# Altium PCB Controller_BattleBot.PcbDoc
Units mil, origin at the board's own origin, x right, y up, seen from the top; angles counter-clockwise.
Board outline 2000 x 1235 mil, 2 copper layers (Top Layer, Bottom Layer); 39 components, 24 nets, 147 pads, 17 vias.
Unrouted connection lines stored in the file: 6.
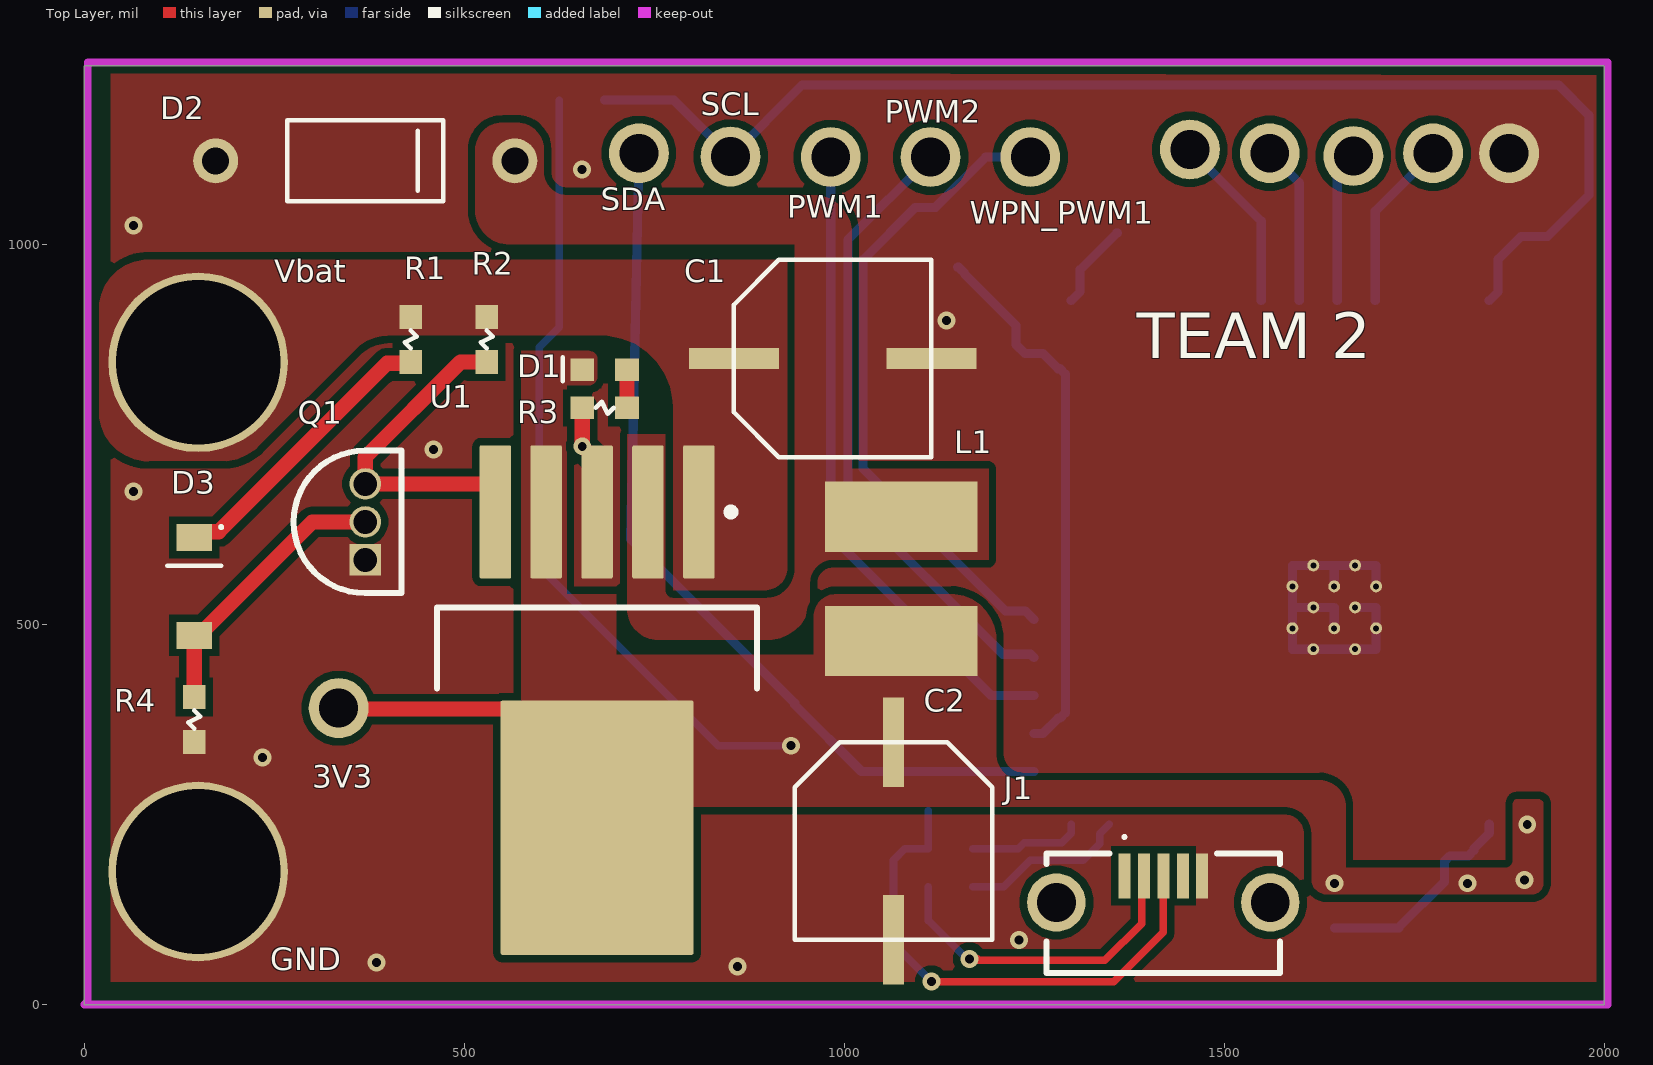
[diagram p0: Top Layer view]
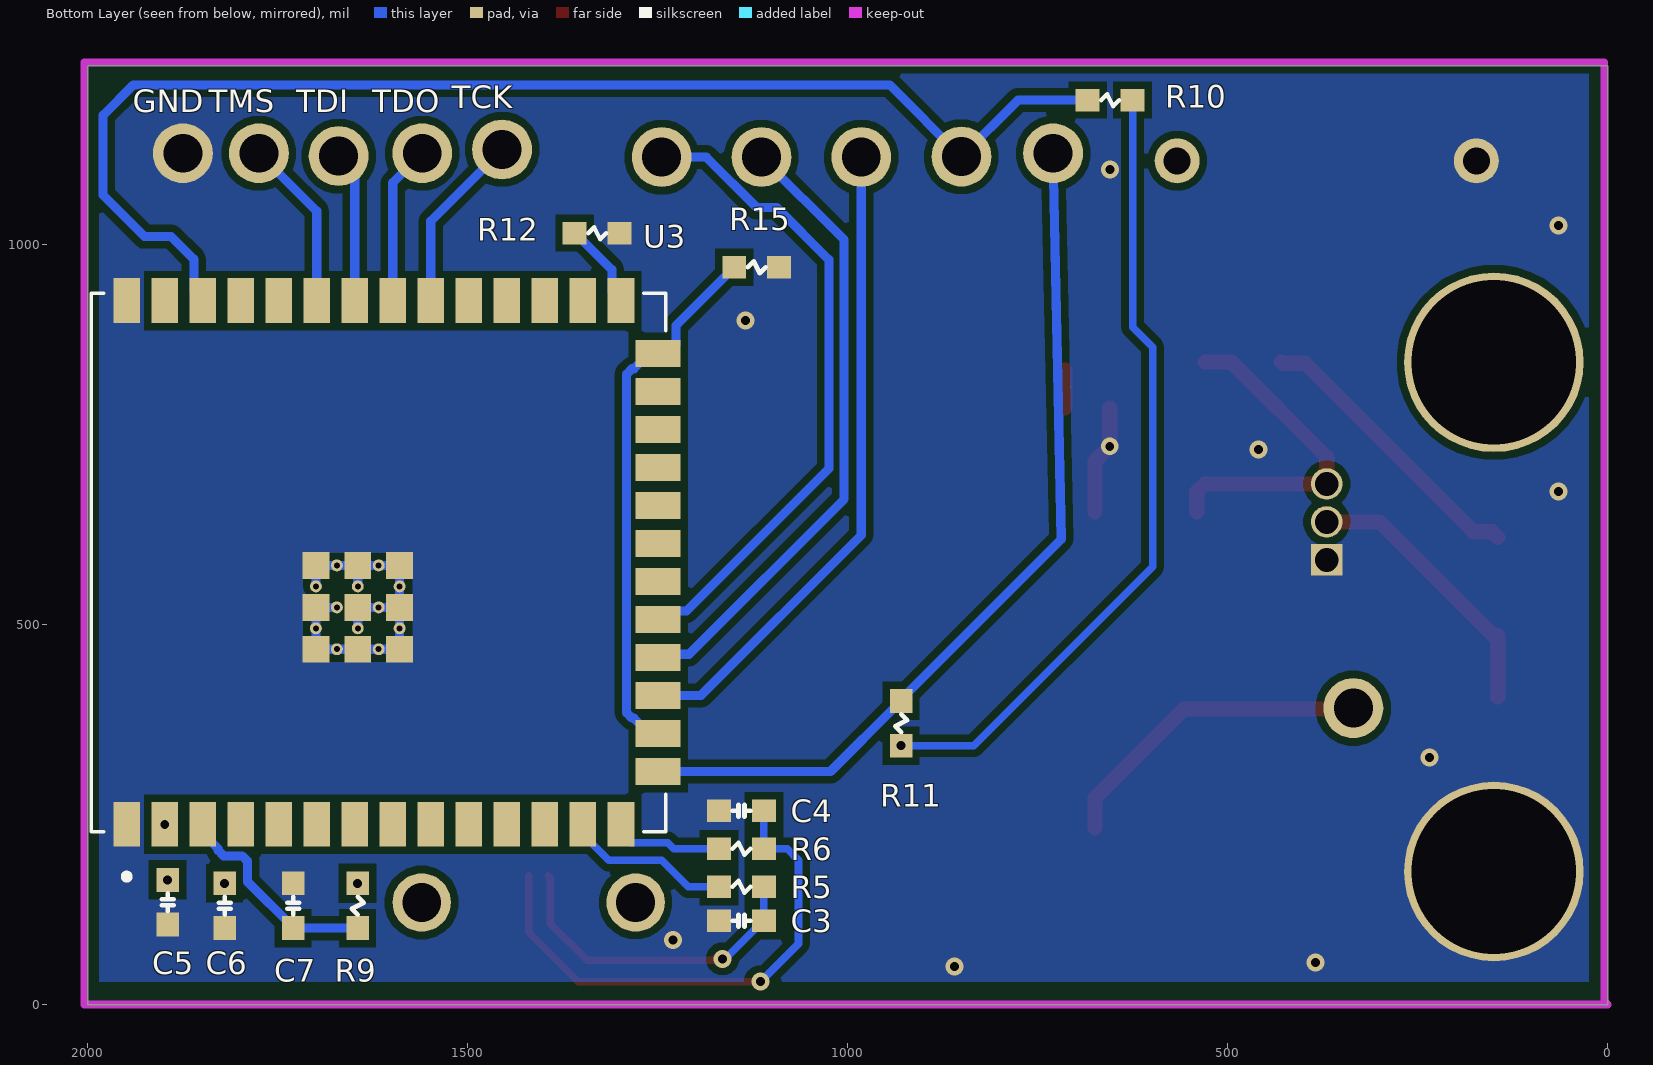
[diagram p1: Bottom Layer view, seen from below]
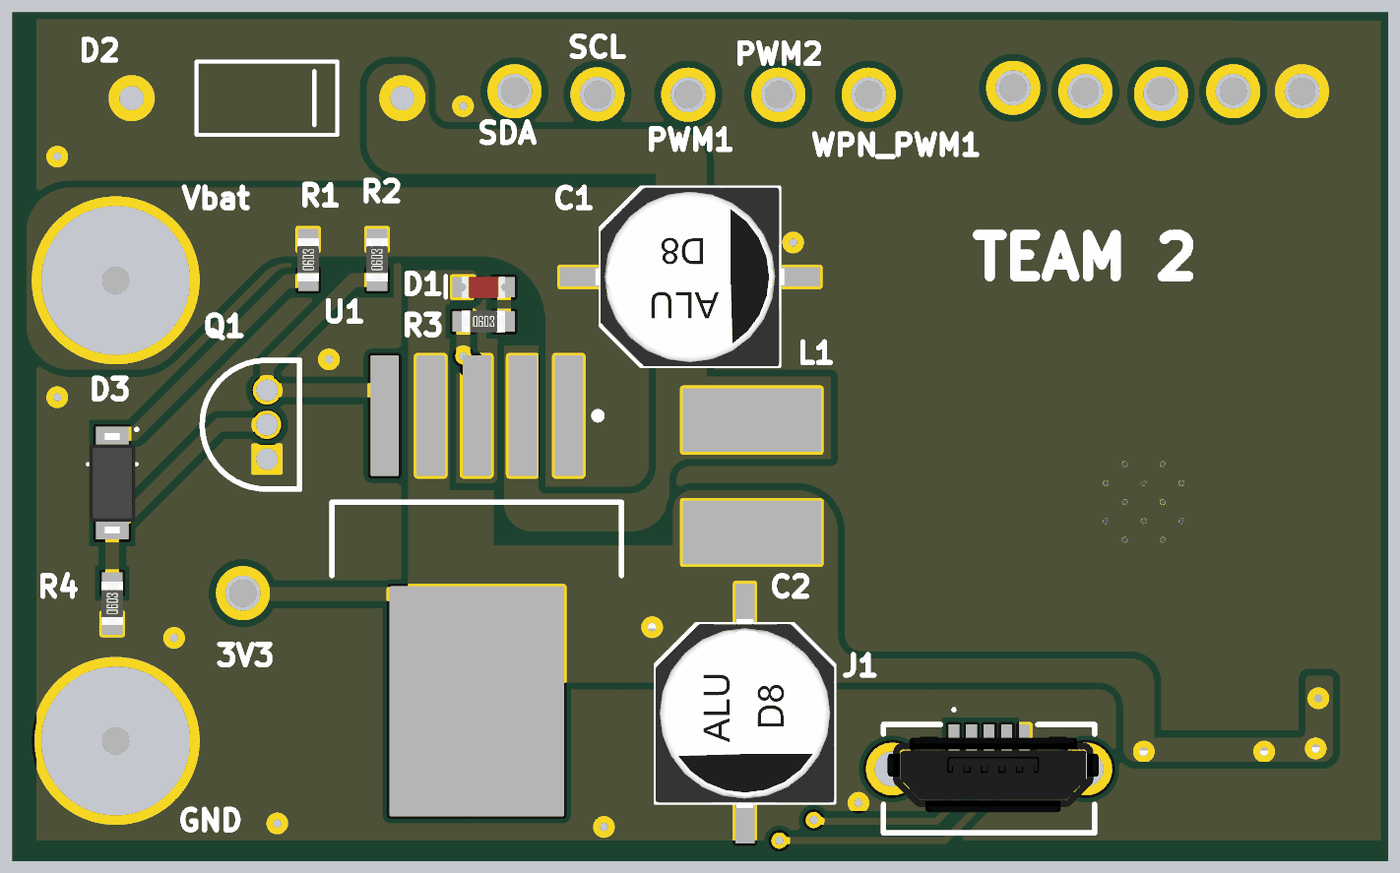
[diagram p2: 3D render of the assembled board from above, using the file's embedded part models]
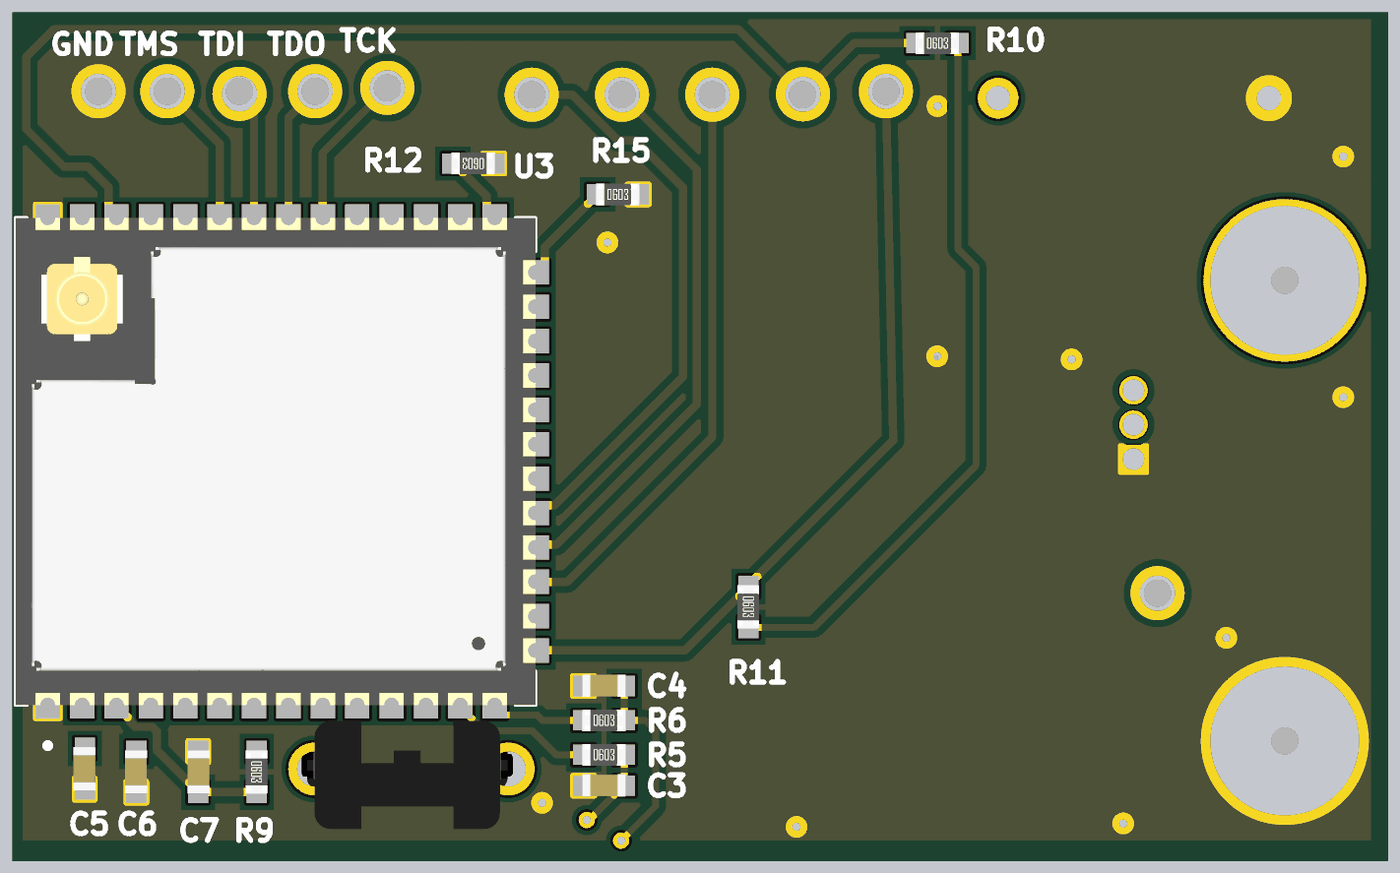
[diagram p3: 3D render of the assembled board from below, using the file's embedded part models]

## Layer stack, top to bottom
Top Solder: solder mask 0.4, Solder Resist, Dk 3.5
Top Layer: signal copper 1.4
Dielectric 1: dielectric 12.6, FR-4, Dk 4.8
Bottom Layer: signal copper 1.4
Bottom Solder: solder mask 0.4, Solder Resist, Dk 3.5

## Board outline
0,0 2000,0 2000,1235 0,1235

## Design rules (kind name [scope] priority, off if disabled: settings)
Clearance [All] p1: gap=10 ignorepadtopadclearanceinfootprint=FALSE except(0: Arc-Hole Track-Hole SMDPad-Hole THPad-Hole Via-Hole Fill-Hole Poly-Hole Region-Hole Text-Hole; 6: Arc-Arc Arc-Track Arc-SMDPad Arc-THPad Track-Track Track-SMDPad Track-THPad SMDPad-SMDPad SMDPad-THPad THPad-THPad)
PolygonConnect PolygonConnect_9 [All vs IsNamedPolygon('GND_L01_P008') Or IsNamedPolygon('GND_L02_P007')] p1: connectstyle=Direct reliefconductorwidth=10 reliefentries=4 polygonreliefangle="90 Angle" airgapwidth=10
PolygonConnect PolygonConnect_8 [All vs IsNamedPolygon('NETD2_K_L01_P006')] p2: thpad.connectstyle=Direct thpad.reliefconductorwidth=10 thpad.reliefentries=4 thpad.polygonreliefangle="90 Angle" thpad.airgapwidth=10 smdpad.connectstyle=Direct smdpad.reliefconductorwidth=10 smdpad.reliefentries=4 smdpad.polygonreliefangle="90 Angle" smdpad.airgapwidth=10 via.connectstyle=Relief via.reliefconductorwidth=10 via.reliefentries=4 via.polygonreliefangle="90 Angle" via.airgapwidth=10
PolygonConnect PolygonConnect_7 [All vs IsNamedPolygon('+3V3_L01_P005')] p3: connectstyle=Direct reliefconductorwidth=10 reliefentries=4 polygonreliefangle="90 Angle" airgapwidth=10
PolygonConnect PolygonConnect_6 [All vs IsNamedPolygon('+3V3_L01_P005')] p4: thpad.connectstyle=Direct thpad.reliefconductorwidth=10 thpad.reliefentries=4 thpad.polygonreliefangle="90 Angle" thpad.airgapwidth=10 smdpad.connectstyle=Direct smdpad.reliefconductorwidth=10 smdpad.reliefentries=4 smdpad.polygonreliefangle="90 Angle" smdpad.airgapwidth=10 via.connectstyle=Relief via.reliefconductorwidth=10 via.reliefentries=4 via.polygonreliefangle="90 Angle" via.airgapwidth=10
PolygonConnect PolygonConnect_5 [All vs IsNamedPolygon('+3V3_L01_P005')] p5: thpad.connectstyle=Direct thpad.reliefconductorwidth=10 thpad.reliefentries=4 thpad.polygonreliefangle="90 Angle" thpad.airgapwidth=10 smdpad.connectstyle=Direct smdpad.reliefconductorwidth=10 smdpad.reliefentries=4 smdpad.polygonreliefangle="90 Angle" smdpad.airgapwidth=10 via.connectstyle=Relief via.reliefconductorwidth=10 via.reliefentries=4 via.polygonreliefangle="90 Angle" via.airgapwidth=10
PolygonConnect PolygonConnect_4 [All vs IsNamedPolygon('NETD2_K_L01_P001')] p6: thpad.connectstyle=Direct thpad.reliefconductorwidth=10 thpad.reliefentries=4 thpad.polygonreliefangle="90 Angle" thpad.airgapwidth=10 smdpad.connectstyle=Direct smdpad.reliefconductorwidth=10 smdpad.reliefentries=4 smdpad.polygonreliefangle="90 Angle" smdpad.airgapwidth=10 via.connectstyle=Relief via.reliefconductorwidth=10 via.reliefentries=4 via.polygonreliefangle="90 Angle" via.airgapwidth=10
PolygonConnect PolygonConnect_3 [All vs IsNamedPolygon('VBAT_L01_P000')] p7: thpad.connectstyle=Direct thpad.reliefconductorwidth=10 thpad.reliefentries=4 thpad.polygonreliefangle="90 Angle" thpad.airgapwidth=10 smdpad.connectstyle=Direct smdpad.reliefconductorwidth=10 smdpad.reliefentries=4 smdpad.polygonreliefangle="90 Angle" smdpad.airgapwidth=10 via.connectstyle=Relief via.reliefconductorwidth=10 via.reliefentries=4 via.polygonreliefangle="90 Angle" via.airgapwidth=10
PolygonConnect PolygonConnect_2 [All vs IsNamedPolygon('VBAT_L01_P000')] p8: thpad.connectstyle=Direct thpad.reliefconductorwidth=10 thpad.reliefentries=4 thpad.polygonreliefangle="90 Angle" thpad.airgapwidth=10 smdpad.connectstyle=Relief smdpad.reliefconductorwidth=10 smdpad.reliefentries=4 smdpad.polygonreliefangle="90 Angle" smdpad.airgapwidth=10 via.connectstyle=Relief via.reliefconductorwidth=10 via.reliefentries=4 via.polygonreliefangle="90 Angle" via.airgapwidth=10
PolygonConnect PolygonConnect_1 [All vs IsNamedPolygon('VBAT_L01_P000')] p9: thpad.connectstyle=Relief thpad.reliefconductorwidth=10 thpad.reliefentries=4 thpad.polygonreliefangle="90 Angle" thpad.airgapwidth=10 smdpad.connectstyle=Direct smdpad.reliefconductorwidth=10 smdpad.reliefentries=4 smdpad.polygonreliefangle="90 Angle" smdpad.airgapwidth=10 via.connectstyle=Relief via.reliefconductorwidth=10 via.reliefentries=4 via.polygonreliefangle="90 Angle" via.airgapwidth=10
PolygonConnect [All] p10: connectstyle=Relief reliefconductorwidth=10 reliefentries=4 polygonreliefangle="90 Angle" airgapwidth=10
RoutingVias [All] p1: holewidth=28 width=50 viastyle="Through Hole" minholewidth=28 minwidth=50 maxholewidth=28 maxwidth=50
SolderMaskExpansion [All] p1: expansion=4 istentingtop=FALSE
Width [All] p1: maxlimit=50 minlimit=10 preferedwidth=10 minimp=50.000000 maximp=50.000000 favimp=50.000000
30 further rules are at their usual default settings.

## Classes and differential pairs
component class Power_Schematics: C1 C2 D1 D2 D3 GND L1 Q1 R1 R2 R3 R4 U1 Vbat
component class Microcontroller: C3 C4 C5 C6 C7 GND J1 PWM1 PWM2 R5 R6 R9 R10 R11 R12 R15 SCL SDA TCK TDI TDO TMS U3 WPN_PWM1

## Components (designator, comment, footprint, x,y, rotation, side; value= is the part's Value field where it differs from the comment)
3V3 "Testpoint" Testpoint 335,390 r90 top
C1 "680uF-6.3D7.7H-SMD 25V" CAP-6.3D7.7H-SMD 985,850 r0 top
C2 "220uF-6.3D7.7H-SMD 25V" CAP-6.3D7.7H-SMD 1065,215.08 r270 top
C3 "0.1uF" CAP-0603 1140,110 r180 bottom
C4 "0.1uF" CAP-0603 1140,255 r180 bottom
C5 "0.1uF" CAP-0603 1895,134.53 r90 bottom
C6 "22uF" CAP-0603 1820,130 r90 bottom
C7 "1uF" CAP-0603 1730,130 r270 bottom
D1 "LEDRED-0603" LEDRED-0603 685,835 r180 top
D2 "1N5824" DO41-10 370,1110 r0 top
D3 "12V" SOD123 145,550 r270 top
GND "Testpoint" Testpoint 1875,1120 r90 bottom
GND "Testpoint" Testpoint 150,175 r90 top
J1 "USB3140-30-0170-0-C" USB31403001700C 1420,120.08 r0 top
L1 "VLS6045EX-470M-H" IND-6045 1075,560 r270 top
PWM1 "Testpoint" Testpoint 982.5,1115 r90 top
PWM2 "Testpoint" Testpoint 1113.75,1115 r90 top
Q1 "2N3904BU" FAIR-TO-92 370,585 r90 top
R1 "10k" RES-0603 430,875 r90 top
R2 "47k" RES-0603 530,875 r90 top
R3 "200" RES-0603 685,785 r0 top
R4 "10k" RES-0603 145,375 r90 top
R5 "100" RES-0603 1140,155 r180 bottom
R6 "100" RES-0603 1140,205 r180 bottom
R9 "10k" RES-0603 1645,130 r270 bottom
R10 "5.1k" RES-0603 655,1190 r180 bottom
R11 "5.1k" RES-0603 930,370 r270 bottom
R12 "100" RES-0603 1330,1015 r0 bottom
R15 "100" RES-0603 1120,970 r180 bottom
SCL "Testpoint" Testpoint 851.25,1115 r0 top
SDA "Testpoint" Testpoint 730,1120 r0 top
TCK "Testpoint" Testpoint 1455,1125 r90 bottom
TDI "Testpoint" Testpoint 1670,1120 r90 bottom
TDO "Testpoint" Testpoint 1560,1120 r90 bottom
TMS "Testpoint" Testpoint 1775,1120 r90 bottom
U1 "LM2596S-3.3/NOPB" KTT0005B_M 675,400 r270 top
U3 "ESP32-S3-WROOM-1U" XCVR_ESP32-S3-WROOM-1U 1617.72,581.61 r90 bottom
Vbat "Testpoint" Testpoint 150,845 r90 top
WPN_PWM1 "Testpoint" Testpoint 1245,1115 r90 top

## Footprints (in the part's own frame and the unit in brackets; to place one, negate y for a bottom-side part, rotate by r counter-clockwise, add the part's x,y. Pads: shape width x height; smd on the part's side, far side on the other; paste and mask are expansions set on the pad)
CAP-6.3D7.7H-SMD [mm]
  rect 3x0.7 smd: NEG(3.3,0) POS(-3.3,0)
  silkscreen extent -3.3,-3.3 3.3,3.3, body extent -3.5,-3.3 3.5,3.3, height 7.7
CAP-0603 [mm]
  rect 0.8x0.75 smd: 1(-0.75,0) 2(0.75,0)
  silkscreen extent -0.3,-0.2 0.3,0.2, body extent -0.8,-0.4 0.8,0.42, height 0.81
DO41-10 [mm]
  round 1.5 hole 0.9 unplated: A(-5,0) K(5,0)
  silkscreen extent -2.6,-1.35 2.6,1.35, body extent -2.6,-1.34 2.6,1.35, height 2.85
FAIR-TO-92 [mm] "TO, 3-Leads, Body Dia 4.79mm, Pitch 1.27mm"
  rect 1.05x1.05 hole 0.8 mask+0.05: 1(0,0)
  round 1.05 hole 0.8 mask+0.05: 2(1.27,0) 3(2.54,0)
  silkscreen extent -1.11,-1.21 3.65,2.4, body extent -1.11,-1.21 3.65,2.4, height 5.33
IND-6045 [mm]
  rect 2.35x5.1 smd: 1(-2.075,0) 2(2.075,0)
  body extent -3.15,-3 3.15,3, height 4.5
KTT0005B_M [mm] "DPAK, 5-Leads, Body 10.65x9.65mm, Pitch 1.7mm, IPC Low Density"
  rrect10% 4.45x1.05 smd: 1(-6.3,3.4) 2(-6.3,1.7) 3(-6.3,0) 4(-6.3,-1.7) 5(-6.3,-3.4)
  rrect2% 8.5x6.45 smd: 6(4.25,0)
  silkscreen extent -6.42,-5.35 -0.4,5.35, body extent -3.1,-5.32 6.55,5.33, height 4.83
LEDRED-0603 [mm]
  rect 0.8x0.75 smd: A(-0.75,0) K(0.75,0)
  silkscreen extent 1.4,-0.42 1.4,0.38, body extent -0.8,-0.4 0.8,0.4, height 0.53
RES-0603 [mm]
  rect 0.8x0.75 smd: 1(-0.75,0) 2(0.75,0)
  silkscreen extent -0.3,-0.2 0.3,0.2, body extent -0.8,-0.4 0.8,0.4, height 0.44
SOD123 [mm] "SODFL, 2-Leads, Body 1.55x3.70mm, IPC Medium Density"
  rect 0.9x1.2 smd: A(1.635,0) K(-1.635,0)
  silkscreen extent -2.03,-0.9 -0.7,0.95, body extent -1.85,-0.85 1.85,0.85, height 1.3
Testpoint [mm]
  round 1 smd: 1(0,0)
USB31403001700C [mm]
  rect 0.4x1.5 smd: 1(-1.3,1.25) 2(-0.65,1.25) 3(0,1.25) 4(0.65,1.25) 5(1.3,1.25)
  round 1.95 hole 1.3: MH1(-3.575,0.36) MH2(3.575,0.36)
  silkscreen extent -3.9,-2 3.9,2.6, body extent -3.75,-1.86 4.06,2.14, height 5.23
XCVR_ESP32-S3-WROOM-1U [mm]
  rect 1.5x0.9 smd: 1(-8.75,8.41) 2(-8.75,7.14) 3(-8.75,5.87) 4(-8.75,4.6) 5(-8.75,3.33) 6(-8.75,2.06) 7(-8.75,0.79) 8(-8.75,-0.48) 9(-8.75,-1.75) 10(-8.75,-3.02) 11(-8.75,-4.29) 12(-8.75,-5.56) 13(-8.75,-6.83) 14(-8.75,-8.1) 27(8.75,-8.1) 28(8.75,-6.83) 29(8.75,-5.56) 30(8.75,-4.29) 31(8.75,-3.02) 32(8.75,-1.75) 33(8.75,-0.48) 34(8.75,0.79) 35(8.75,2.06) 36(8.75,3.33) 37(8.75,4.6) 38(8.75,5.87) 39(8.75,7.14) 40(8.75,8.41)
  rect 0.9x1.5 smd: 15(-6.985,-9.35) 16(-5.715,-9.35) 17(-4.445,-9.35) 18(-3.175,-9.35) 19(-1.905,-9.35) 20(-0.635,-9.35) 21(0.635,-9.35) 22(1.905,-9.35) 23(3.175,-9.35) 24(4.445,-9.35) 25(5.715,-9.35) 26(6.985,-9.35)
  rect 0.9x0.9 smd: 41_1(-2.9,2.09) 41_2(-1.5,2.09) 41_3(-0.1,2.09) 41_4(-2.9,0.69) 41_5(-1.5,0.69) 41_6(-0.1,0.69) 41_7(-2.9,-0.71) 41_8(-1.5,-0.71) 41_9(-0.1,-0.71)
  round 0.4 hole 0.2 mask+0: 41_10(-2.2,2.09) 41_11(-0.8,2.09) 41_12(-2.9,1.39) 41_13(-1.5,1.39) 41_14(-0.1,1.39) 41_15(-2.2,0.69) 41_16(-0.8,0.69) 41_17(-2.9,-0.01) 41_18(-1.5,-0.01) 41_19(-0.1,-0.01) 41_20(-2.2,-0.71) 41_21(-0.8,-0.71)
  silkscreen extent -10.6,-9.6 9,9.6, body extent -9,-9.6 9,9.6, height 3.35

## Part data
3V3 GND GND PWM1 PWM2 SCL SDA TCK TDI TDO TMS Vbat WPN_PWM1: library part CMP-009-000182-1, Design Item ID=Testpoint, Source=ife19_Elec_Library.SchLib
C1 C2: library part CMP-050-000094-1, Design Item ID=CAP-6.3D7.7H-SMD, Source=ife19_Elec_Library.SchLib
C3 C4 C5 C6 C7: library part CMP-009-000303-1, Design Item ID=CAP-0603, Source=ife19_Elec_Library.SchLib
D1: library part CMP-009-000189-1, Design Item ID=LEDRED-0603, Source=ife19_Elec_Library.SchLib
D2: library part CMP-010-000010-1, Design Item ID=DIODE-DO41-10, Source=ife19_Elec_Library.SchLib
D3: library part CMP-010-000008-1, Design Item ID=DIODE-SOD123, Source=ife19_Elec_Library.SchLib
J1: "Connector", Manufacturer_Name="GCT (GLOBAL CONNECTOR TECHNOLOGY)", Mouser Part Number=640-USB31403001700C, Datasheet Link=https://gct.co/files/drawings/usb3140.pdf, Height=6.7mm, Manufacturer_Part_Number=USB3140-30-0170-0-C, Mouser Price/Stock=https://www.mouser.co.uk/ProductDetail/GCT/USB3140-30-0170-0-C?qs=KUoIvG%2F9IlYQ5y%252BQm2TPIg%3D%3D
L1: library part CMP-011-000044-1, Design Item ID=IND-6045, Source=ife19_Elec_Library.SchLib
Q1: library part CMP-2000-04944-1, "NPN General-Purpose Amplifier, 40 V VCEO, 0.2 A, -55 to 150 degC, 2-Pin TO-92, RoHS, Bulk", Manufacturer=FairchildSemiconductor, Maximum Collector Base Voltage=60V, Maximum Collector Emitter Saturation Voltage=0.2@1mA@10mA, Maximum Collector Emitter Voltage=40V, Maximum DC Collector Current=0.2A, Maximum Operating Frequency=300(Min)MHz, Maximum Power Dissipation=625mW, Minimum DC Current Gain=40@0.1mA@1V, Operating Temperature=-55to150degC, Package=3TO-92, Package Description="3-Pin Transistor Outline Package, Body Dia 4.79 mm, Pitch 1.27 mm", Package Reference=TO-92, Category=GPBJT, Datasheet URL=https://datasheet.ciiva.com/4722/2n3904-82270-4722369.pdf, Datasheet Version="Rev. 1.1.0, 10/2014", Manufacturer URL=https://www.fairchildsemi.com/, Mounting=ThroughHole, Packaging=Bulk, Pin Count=3, Rad Hard=No, Type=NPN
R1 R2 R3 R4 R5 R6 R9 R10 R11 R12 R15: library part CMP-014-000032-1, Design Item ID=RES-0603, Source=ife19_Elec_Library.SchLib
U1: library part CMP-0069-00275-3, "SIMPLE SWITCHER® Power Converter 150 KHz 3A Step-Down Voltage Regulator, 5-pin TO-263, Pb-Free", Manufacturer="Texas Instruments", PackageTopMarking="NSUZXYTTE#*LM2596S*-3.3 P+", PowerWise=N, Code_JEDEC=MO-169-AB, ComponentLink1Description="Datasheet URL", ComponentLink1URL=http://www.ti.com/general/docs/lit/getliterature.tsp?genericPartNumber=LM2596&fileType=pdf, CompType=Switcher, PackageDescription="TO-263, Molded, .400 x .390 x .180in, 5 Lead, .067in Pitch, Surface Mount", PackageReference=KTT0005B, PinCount=5, RoHS=Y
U3: library part CMP-218-000000-1, "2.4 GHz Wi-Fi (802.11 b/g/n) and Bluetooth 5 (LE) module", Package=Package, Availability="Not in stock", Check_prices=https://www.snapeda.com/parts/ESP32-S3-WROOM-1U/Espressif+Systems/view-part/?ref=eda, Component Type=Standard, Design Item ID=ESP32-S3-WROOM-1U, MF="Espressif Systems", MP=ESP32-S3-WROOM-1U, Pin Count=49, Price=None, SnapEDA_Link=https://www.snapeda.com/parts/ESP32-S3-WROOM-1U/Espressif+Systems/view-part/?ref=snap, Source=ESP32-S3-WROOM-1U.SchLib

## Free pads (board coordinates)
  round 236.22 hole 216.54 paste-99999: 6(150,175) 6(150,845)
  round 78.74 hole 51.18 paste-99999 mask+0: 7(335,390) 7(730,1120) 7(850.62,1115.63) 7(982.5,1115) 7(1113.75,1115) 7(1245,1115) 7(1455,1125) 7(1560,1120) 7(1670,1116.3) 7(1775,1120) 7(1875,1120)

## Via types
v1: diameter 23.62, hole 11.81, Top Layer to Bottom Layer, 17 vias

## Nets (pads, with @x,y where several pads share a name; then routed paths per layer and width w, separated by ;. In a path a pad name is that pad's centre, name@x,y a point inside that pad or via, vN(x,y) a via of type N, cw(c..) or ccw(c..) an arc to the next point about the centre after c; other vN are vias at no path point)
+3V3: 3V3.1 C2.POS C5.2 C6.2 D1.K L1.2 pad.7@335,390 R9.1 R10.2 R11.2 U1.4 U1.6 U3.2 | length 1481.5
  Top Layer w20: 3V3.1 336.27,388.73 558.03,388.73 675,271.76 U1.6
  Bottom Layer w10: R10.2 625.47,891.21 599.14,864.88 599.14,575.86 834.53,340.47 v1(930,340.47)
  other v1: 1645,159.53 1820,159.53 1895,164.06 1898.82,237.13
GND: C1.NEG C2.NEG C3.1 C4.1 C5.1 C6.1 C7.1 D2.A GND.1 J1.5 pad.6@150,175 pad.7@1875,1120 Q1.1 R3.1 R4.1 R12.1 R15.2 U1.3 U3.1 U3.40 U3.41_1 U3.41_2 U3.41_3 U3.41_4 U3.41_5 U3.41_6 U3.41_7 U3.41_8 U3.41_9 U3.41_10 U3.41_11 U3.41_12 U3.41_13 U3.41_14 U3.41_15 U3.41_16 U3.41_17 U3.41_18 U3.41_19 U3.41_20 U3.41_21 | length 696.2
  Top Layer w20: R3.1 v1(655.47,734.49) 675,714.96 U1.3
  Bottom Layer w12: U3.41_15 U3.41_5 U3.41_18 U3.41_8 ; U3.41_16 U3.41_6 ; U3.41_13 U3.41_2 U3.41_10 U3.41_1 U3.41_12 U3.41_4 U3.41_17 U3.41_7 U3.41_20 U3.41_8 ; U3.41_11 U3.41_3 U3.41_14 U3.41_6 ; U3.41_8 U3.41_21 U3.41_9 U3.41_19 U3.41_6
  other v1: 860,50 385,55 1230,85 235,325 65,675 460,730 1135,900 65,1025 655,1098.46
NetC7_2: C7.2 R9.2 U3.3 | length 285.2
  Bottom Layer w12: R9.2 C7.2 1730,101.46 1790,161.46 1790,188.57 1797.03,195.6 1821.51,195.6 1828.62,202.71 1828.62,205.11 1848.82,225.31 U3.3
NetD1_A: D1.A R3.2 | length 50
  Top Layer w20: R3.2 D1.A
NetD2_K: D2.K L1.1 U1.2
NetD3_A: D3.A Q1.2 R4.2 | length 368
  Top Layer w20: R4.2 D3.A 150.91,485.63 300.28,635 Q1.2
NetD3_K: D3.K R1.1 | length 380.7
  Top Layer w20: D3.K 152.72,622.09 177.09,622.09 398.77,843.77 428.29,843.77 R1.1
NetPWM1_1: pad.7@982.5,1115 PWM1.1 U3.17 | length 852
  Bottom Layer w12: pad.7@982.5,1115 982.5,617.5 1193.39,406.61 U3.17
NetPWM2_1: pad.7@1113.75,1115 PWM2.1 U3.18 | length 826
  Bottom Layer w12: pad.7@1113.75,1115 1005,1006.25 1005,665 1209.11,460.89 1245.33,460.89 U3.18
NetQ1_3: Q1.3 R2.1 U1.5 | length 448.8
  Top Layer w20: R2.1 495.47,845.47 370,720 Q1.3 370.51,685 530.47,685 541.14,674.33 U1.5
NetR5_1: R5.1 U3.13 | length 220.8
  Bottom Layer w10: R5.1 1210,155 1245,190 1314.49,190 1336.1,211.61 1336.1,224.41 U3.13
NetR6_1: R6.1 U3.14 | length 149.5
  Bottom Layer w10: R6.1 1229.39,205 1236.99,212.6 1286.1,212.6 1298.82,225.31 U3.14
NetR10_1: pad.7@850.62,1115.63 R10.1 SCL.1 U3.38 | length 1700.7
  Bottom Layer w12: R10.1 776.25,1190 850.62,1115.63 944.98,1210 1940,1210 1980,1170 1980,1065 1925.4,1010.4 1890.4,1010.4 1860.54,980.54 1860.54,937.82 U3.38
NetR11_1: pad.7@730,1120 R11.1 SDA.1 U3.15 | length 1165.9
  Bottom Layer w12: pad.7@730,1120 719.37,612.09 935,396.46 935,395.47 935,394.49 1022.87,306.61 U3.15
NetR12_2: R12.2 U3.27 | length 114.6
  Bottom Layer w12: U3.27 1310.54,937.82 1310.54,966.99 1358.54,1015 R12.2
NetR15_1: R15.1 U3.16 U3.26 | length 713.4
  Bottom Layer w12: R15.1 1150.51,970 1159.28,961.24 1159.28,960.25 1226.08,893.45 1226.08,868.33 1237.8,856.61 U3.26 1261.42,856.61 1281.62,836.41 1284.02,836.41 1291.13,829.3 1291.13,383.93 1284.1,376.9 1281.7,376.9 1261.42,356.61 U3.16
NetU3_19: pad.7@1245,1115 U3.19 WPN_PWM1.1 | length 857.7
  Bottom Layer w12: pad.7@1245,1115 1186.4,1115 1120.01,1048.61 1093.61,1048.61 1025,980 1025,705 1212.15,517.85 1238.37,517.85 U3.19
TCK: pad.7@1455,1125 TCK.1 U3.32 | length 239.6
  Bottom Layer w12: pad.7@1453.31,1126.14 1548.82,1030.63 U3.32
TDI: pad.7@1670,1116.3 TDI.1 U3.34 | length 202.7
  Bottom Layer w12: U3.34 1648.82,1091.41 1670,1112.59 TDI.1
TDO: pad.7@1560,1120 TDO.1 U3.33 | length 210
  Bottom Layer w12: TDO.1 1598.82,1081.18 U3.33
TMS: pad.7@1775,1120 TMS.1 U3.35 | length 225.5
  Bottom Layer w12: U3.35 1698.82,1043.82 TMS.1
USB_D+: C4.2 J1.3 R6.2 | length 688.6
  Top Layer w10: v1(1115,30) 1355,30 1420,95 J1.3
  Bottom Layer w10: C4.2 R6.2 1080,205 1065,190 1065,80 v1(1115,30)
USB_D-: C3.2 J1.2 R5.2 | length 421.5
  Top Layer w10: v1@1175,60 1176.81,58.19 1343.19,58.19 1391.54,106.54 1391.54,166.42 J1.2
  Bottom Layer w10: R5.2 C3.2 1111.46,110 1161.46,60 v1(1165,60)
Vbat: C1.POS pad.6@150,845 R1.2 R2.2 U1.1 Vbat.1
pads on no net: J1.1 J1.4 J1.MH1 J1.MH2 U3.4 U3.5 U3.6 U3.7 U3.8 U3.9 U3.10 U3.11 U3.12 U3.20 U3.21 U3.22 U3.23 U3.24 U3.25 U3.28 U3.29 U3.30 U3.31 U3.36 U3.37 U3.39

## Polygon pours and split planes (outlines as drawn)
+3V3 on Top Layer "+3V3_L01_P005" (solid, pour order 5): 1145,260 1580,260 cw(c1580,225) 1615,225 1615,165 ccw(c1635,165) 1635,145 1905,145 ccw(c1905,160) 1920,160 1920,265 ccw(c1915,265) 1915,270 1885,270 ccw(c1885,265) 1880,265 1880,190 cw(c1870,190) 1870,180 1660,180 1660,260 ccw(c1625,260) 1625,295 1234.81,295 cw(c1234.81,329.81) 1200,329.81 1200,480 ccw(c1140,480.01) 1140,540 990,540 ccw(c989.99,510) 960,510 960,460 700,460 700,540 635,540 635,815 665,815 ccw(c665.01,824.99) 675,825 675,850 ccw(c665.01,850.01) 665,860 575,860 575,760 575,260
GND on Top Layer "GND_L01_P008" (solid, pour order 8): 35,1227.54 35,30 1995,30 1995,1222.51
NetD2_K on Top Layer "NETD2_K_L01_P006" (solid, pour order 6): 550,1160 570,1160 cw(c570,1125) 605,1125 605,1095 ccw(c635,1095) 635,1065 960,1065 cw(c960,1015) 1010,1015 1010,705 1190,705 1190,585 984.99,584.99 ccw(c984.99,555) 955,555 954.99,535 cw(c900,534.99) 900,480 755,480 cw(c755,520) 715,520 715,750 770,750 770,535 897.43,535 ccw(c897.44,572.56) 935,572.57 935,1000 560,1000 cw(c560,1045) 515,1045 515,1125 cw(c550,1125)
Vbat on Top Layer "VBAT_L01_P000" (solid, pour order 0): 20,915 20,780 ccw(c85,780) 85,715 180.86,715 ccw(c180.86,785.36) 230.61,735.61 357.93,862.93 cw(c399.14,821.72) 399.14,880 680,880 cw(c681.25,786.25) 775,785 775,545 895,545 ccw(c895,575) 925,575 925,980 85,980 ccw(c85,915)
GND on Bottom Layer "GND_L02_P007" (solid, pour order 7): 25.04,1227.54 25.04,30 1985.04,30 1985.04,1222.51

## Keep-outs
Keep-Out Layer:
  lines w10: 0,0 5,5 5,1240 2005,1240 2005,0 0,0

## Silkscreen, mask and mechanical layers (free items; w line width, h text height)
Top Overlay:
  text "TEAM 2" at 1385,850 h60